# Altium PCB PCB1.PcbDoc (part 1 of 3)
Units mm, origin at the board's own origin, x right, y up, seen from the top; angles counter-clockwise.
Board outline 76.07 x 51.31 mm, 2 copper layers (Top Layer, Bottom Layer), stack 0.771 mm thick; 93 components, 68 nets, 330 pads, 277 vias.
Unrouted connection lines stored in the file: 4.
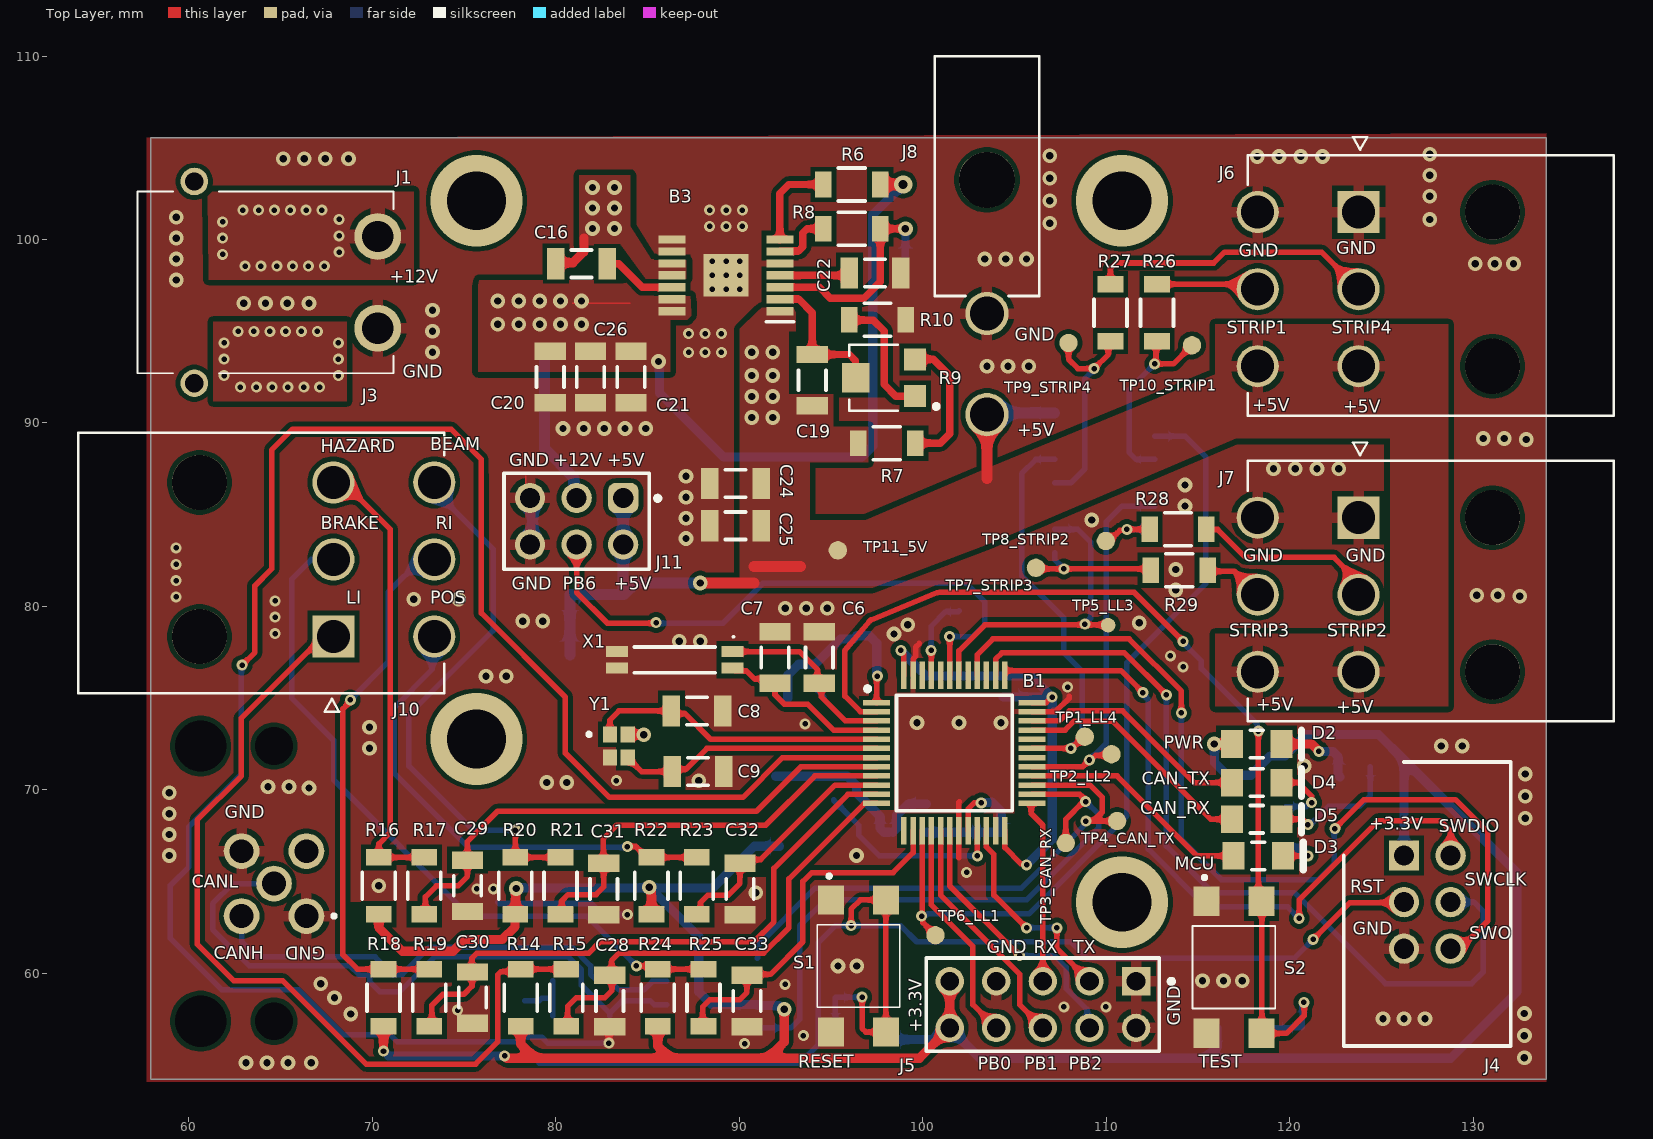
[diagram p0: Top Layer view]
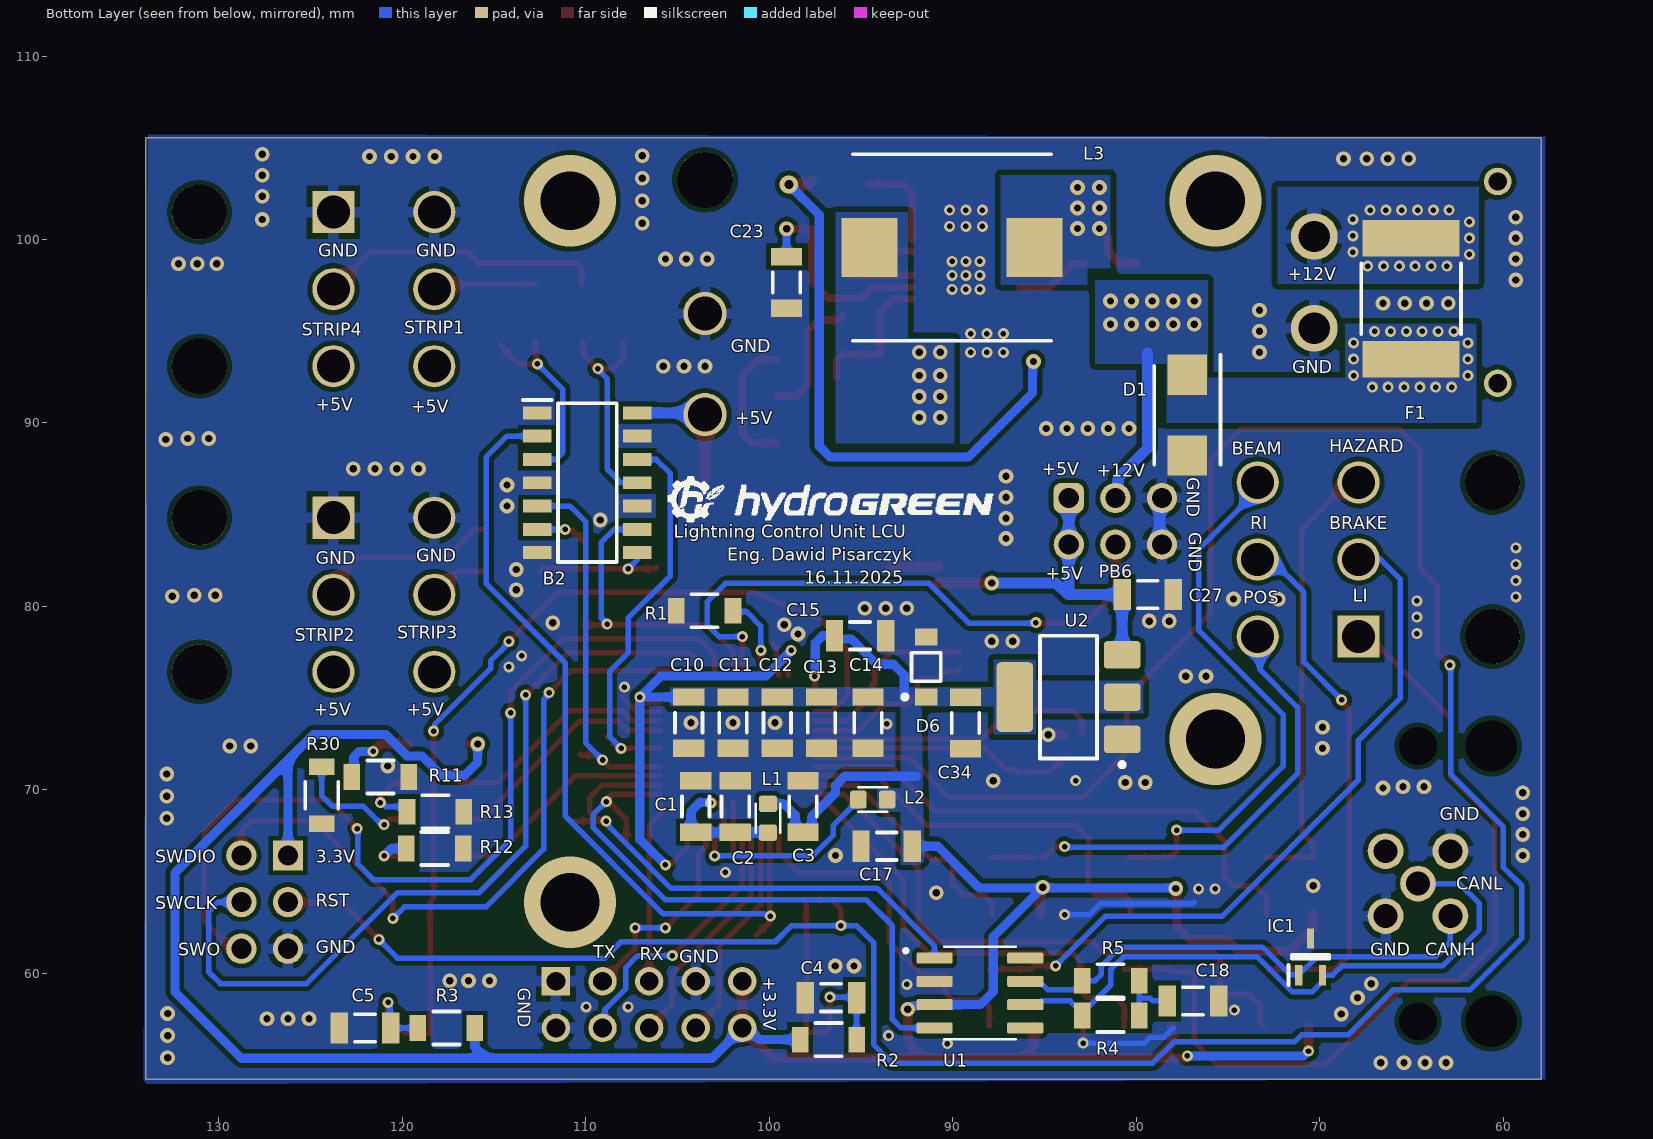
[diagram p1: Bottom Layer view, seen from below]
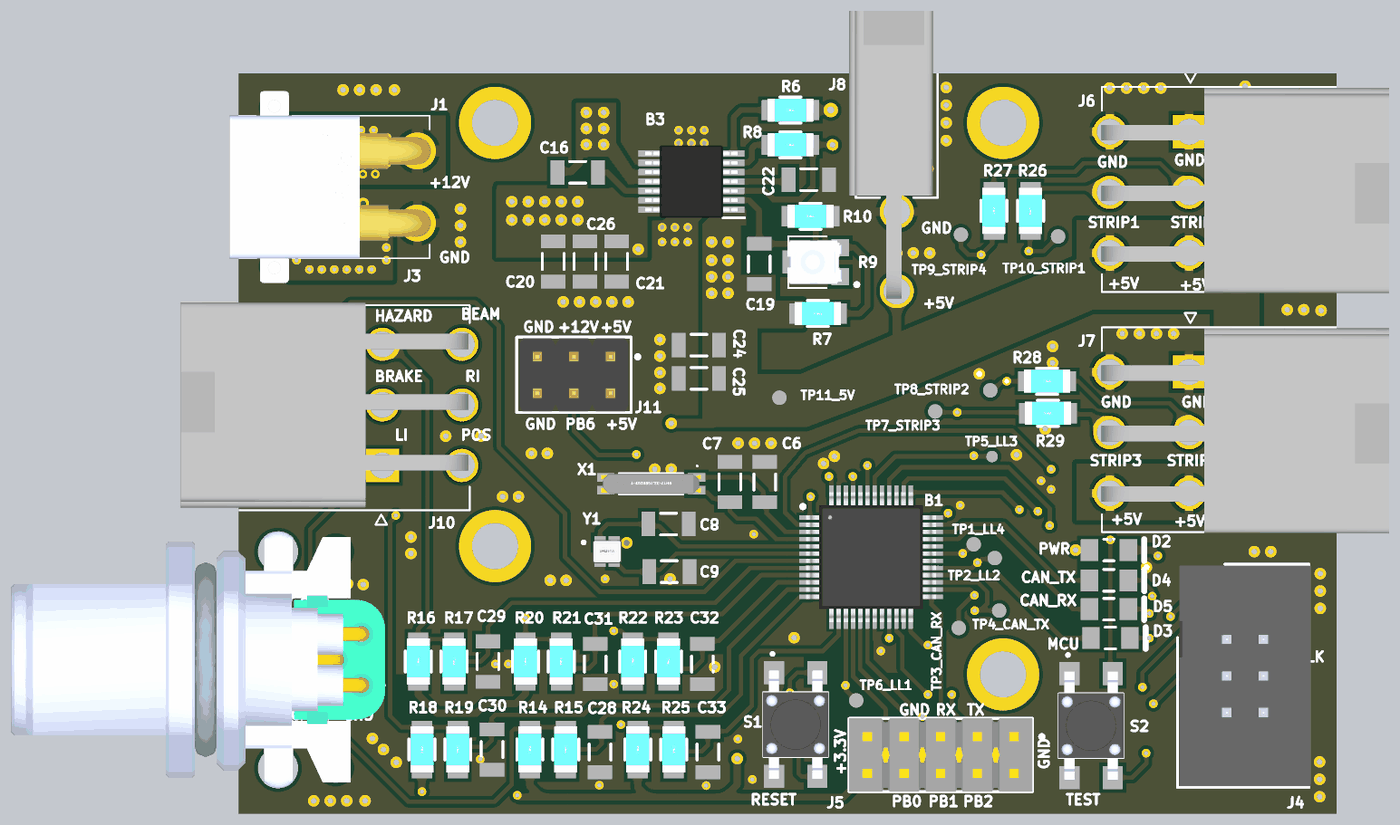
[diagram p3: 3D render of the assembled board from above, using the file's embedded part models]
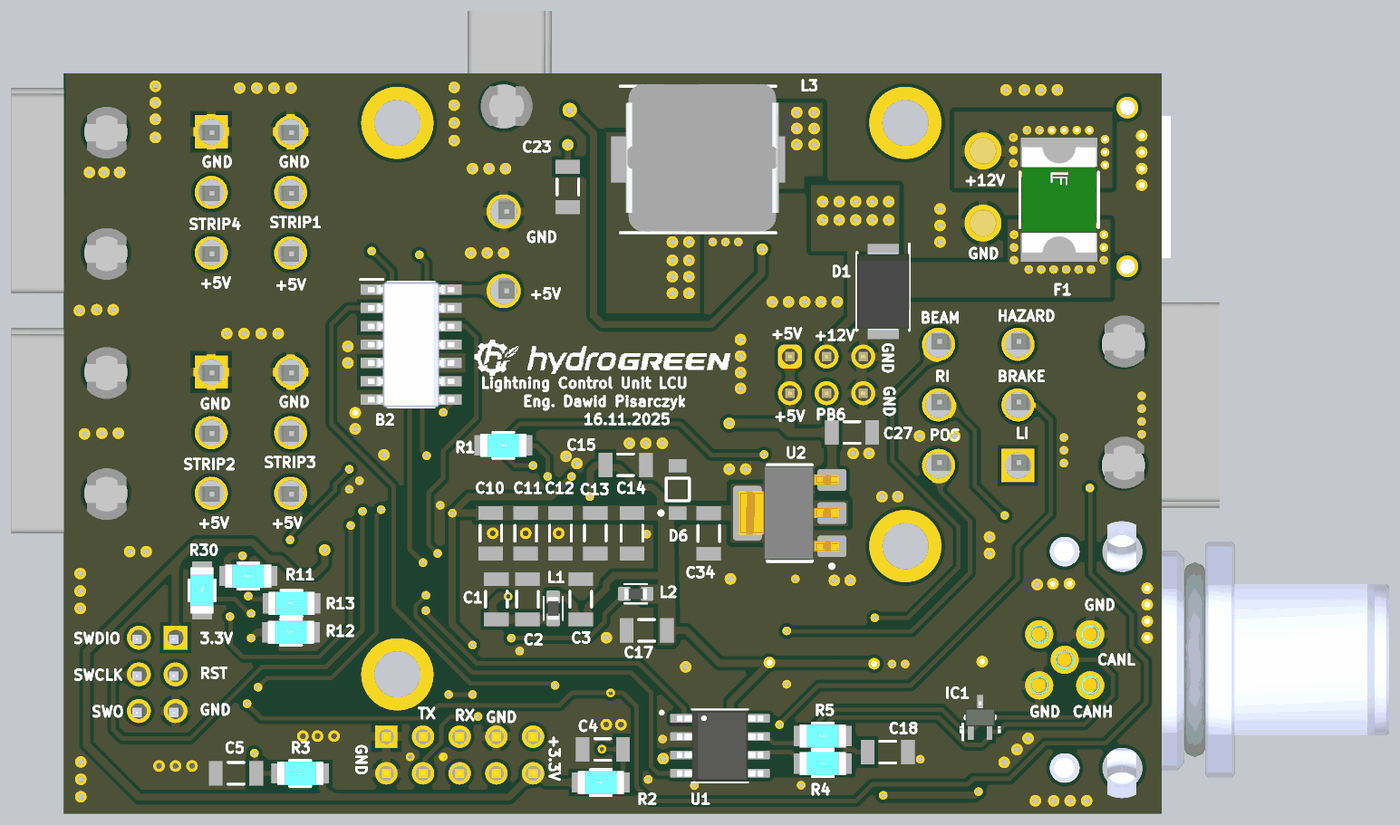
[diagram p4: 3D render of the assembled board from below, using the file's embedded part models]

## Layer stack, top to bottom
Top Solder: solder mask 0.0102, Solder Resist, Dk 3.5
Top Layer: signal copper 0.0356
Dielectric 1: dielectric 0.7, FR-4, Dk 4.8
Bottom Layer: signal copper 0.0356
Bottom Solder: solder mask 0.0102, Solder Resist, Dk 3.5

## Board outline
57.912,54.229 133.985,54.229 133.985,54.237 133.985,105.537 57.912,105.537

## Design rules (kind name [scope] priority, off if disabled: settings)
Clearance stm32g4 [HasFootprint('STM32G491CET6')] p1: gap=0.2 ignorepadtopadclearanceinfootprint=TRUE
Clearance [All] p2: gap=0.25 ignorepadtopadclearanceinfootprint=TRUE except(0.2: Arc-Arc Arc-Track Arc-SMDPad Track-Track Track-SMDPad SMDPad-SMDPad; 0.3: Poly-Poly)
DiffPairsRouting [All] p1: maxlimit=0.25 minlimit=0.2 mostfreqgap=0.2 toplayer_minwidth=0.3 toplayer_maxwidth=0.3 toplayer_prefwidth=0.3 bottomlayer_minwidth=0.3 bottomlayer_maxwidth=0.3 bottomlayer_prefwidth=0.3 maxuncoupledlength=12.7
HoleSize [All] p1: absolutevalues=TRUE maxlimit=5 minlimit=0.025 maxpercent=80.000 minpercent=20.000
PolygonConnect VIN [InNet('VIN')] p1: thpad.connectstyle=Relief thpad.reliefconductorwidth=0.3 thpad.reliefentries=4 thpad.polygonreliefangle="90 Angle" thpad.airgapwidth=0.3 smdpad.connectstyle=Direct smdpad.reliefconductorwidth=0.254 smdpad.reliefentries=4 smdpad.polygonreliefangle="90 Angle" smdpad.airgapwidth=0.254 via.connectstyle=Direct via.reliefconductorwidth=0.254 via.reliefentries=4 via.polygonreliefangle="90 Angle" via.airgapwidth=0.254
PolygonConnect +5V_OUT [InNet('+5V_OUT') vs InNet('+5V_OUT')] p2: thpad.connectstyle=Relief thpad.reliefconductorwidth=0.6 thpad.reliefentries=4 thpad.polygonreliefangle="90 Angle" thpad.airgapwidth=0.3 smdpad.connectstyle=Direct smdpad.reliefconductorwidth=0.254 smdpad.reliefentries=4 smdpad.polygonreliefangle="90 Angle" smdpad.airgapwidth=0.254 via.connectstyle=Direct via.reliefconductorwidth=0.254 via.reliefentries=4 via.polygonreliefangle="90 Angle" via.airgapwidth=0.254
PolygonConnect PolygonConnect_1 [InNet('NetD1_3') vs InNet('NetD1_3')] p3: thpad.connectstyle=Relief thpad.reliefconductorwidth=0.6 thpad.reliefentries=4 thpad.polygonreliefangle="90 Angle" thpad.airgapwidth=0.3 smdpad.connectstyle=Direct smdpad.reliefconductorwidth=0.254 smdpad.reliefentries=4 smdpad.polygonreliefangle="90 Angle" smdpad.airgapwidth=0.254 via.connectstyle=Direct via.reliefconductorwidth=0.254 via.reliefentries=4 via.polygonreliefangle="90 Angle" via.airgapwidth=0.254
PolygonConnect [InNet('NetB3_13') vs InNet('NetB3_13')] p4: thpad.connectstyle=Relief thpad.reliefconductorwidth=0.6 thpad.reliefentries=4 thpad.polygonreliefangle="90 Angle" thpad.airgapwidth=0.3 smdpad.connectstyle=Direct smdpad.reliefconductorwidth=0.254 smdpad.reliefentries=4 smdpad.polygonreliefangle="90 Angle" smdpad.airgapwidth=0.254 via.connectstyle=Direct via.reliefconductorwidth=0.254 via.reliefentries=4 via.polygonreliefangle="90 Angle" via.airgapwidth=0.254
PolygonConnect +3V3 [InNet('+3V3') vs InNet('+3V3')] p5: thpad.connectstyle=Relief thpad.reliefconductorwidth=0.6 thpad.reliefentries=4 thpad.polygonreliefangle="90 Angle" thpad.airgapwidth=0.3 smdpad.connectstyle=Direct smdpad.reliefconductorwidth=0.254 smdpad.reliefentries=4 smdpad.polygonreliefangle="90 Angle" smdpad.airgapwidth=0.254 via.connectstyle=Direct via.reliefconductorwidth=0.254 via.reliefentries=4 via.polygonreliefangle="90 Angle" via.airgapwidth=0.254
PolygonConnect +5V_EXT [InNet('+5V_EXT') vs InNet('+5V_EXT')] p6: thpad.connectstyle=Relief thpad.reliefconductorwidth=0.6 thpad.reliefentries=4 thpad.polygonreliefangle="90 Angle" thpad.airgapwidth=0.4 smdpad.connectstyle=Direct smdpad.reliefconductorwidth=0.254 smdpad.reliefentries=4 smdpad.polygonreliefangle="90 Angle" smdpad.airgapwidth=0.254 via.connectstyle=Direct via.reliefconductorwidth=0.254 via.reliefentries=4 via.polygonreliefangle="90 Angle" via.airgapwidth=0.254
PolygonConnect GND_1 [InNet('GND')] p7: thpad.connectstyle=Relief thpad.reliefconductorwidth=0.6 thpad.reliefentries=4 thpad.polygonreliefangle="90 Angle" thpad.airgapwidth=0.3 smdpad.connectstyle=Direct smdpad.reliefconductorwidth=0.254 smdpad.reliefentries=4 smdpad.polygonreliefangle="90 Angle" smdpad.airgapwidth=0.254 via.connectstyle=Direct via.reliefconductorwidth=0.254 via.reliefentries=4 via.polygonreliefangle="90 Angle" via.airgapwidth=0.254
PolygonConnect SW [InNet('SW') vs InNet('SW')] p8: thpad.connectstyle=Relief thpad.reliefconductorwidth=0.6 thpad.reliefentries=4 thpad.polygonreliefangle="90 Angle" thpad.airgapwidth=0.3 smdpad.connectstyle=Direct smdpad.reliefconductorwidth=0.254 smdpad.reliefentries=4 smdpad.polygonreliefangle="90 Angle" smdpad.airgapwidth=0.254 via.connectstyle=Direct via.reliefconductorwidth=0.254 via.reliefentries=4 via.polygonreliefangle="90 Angle" via.airgapwidth=0.254
PolygonConnect +5V [InNet('+5V') vs InNet('+5V')] p9: thpad.connectstyle=Relief thpad.reliefconductorwidth=0.6 thpad.reliefentries=4 thpad.polygonreliefangle="90 Angle" thpad.airgapwidth=0.3 smdpad.connectstyle=Direct smdpad.reliefconductorwidth=0.254 smdpad.reliefentries=4 smdpad.polygonreliefangle="90 Angle" smdpad.airgapwidth=0.254 via.connectstyle=Direct via.reliefconductorwidth=0.254 via.reliefentries=4 via.polygonreliefangle="90 Angle" via.airgapwidth=0.254
PolygonConnect +12 [InNet('+12V') vs InNet('+12V')] p10: thpad.connectstyle=Relief thpad.reliefconductorwidth=0.8 thpad.reliefentries=4 thpad.polygonreliefangle="90 Angle" thpad.airgapwidth=0.3 smdpad.connectstyle=Direct smdpad.reliefconductorwidth=0.254 smdpad.reliefentries=4 smdpad.polygonreliefangle="90 Angle" smdpad.airgapwidth=0.254 via.connectstyle=Direct via.reliefconductorwidth=0.254 via.reliefentries=4 via.polygonreliefangle="90 Angle" via.airgapwidth=0.254
RoutingVias 3V_3 [InNet('+3V3')] p1: holewidth=0.4 width=0.8 viastyle="Through Hole" minholewidth=0.3 minwidth=0.6 maxholewidth=0.5 maxwidth=1
RoutingVias GND [InNet('GND')] p2: holewidth=0.3 width=0.6 viastyle="Through Hole" minholewidth=0.3 minwidth=0.6 maxholewidth=0.3 maxwidth=0.6
RoutingVias [All] p3: holewidth=0.3 width=0.6 viastyle="Through Hole" minholewidth=0.2 minwidth=0.4 maxholewidth=0.5 maxwidth=1
SolderMaskExpansion [All] p1: expansion=0 istentingtop=FALSE
SupplyNets "Schematic Supply Nets_1" [InNet('VIN')] p1: voltage=0.000
SupplyNets "Schematic Supply Nets_6" [InNet('GND')] p2: voltage=0.000
SupplyNets "Schematic Supply Nets_3" [InNet('+3V3')] p3: voltage=0.000
SupplyNets "Schematic Supply Nets_2" [InNet('+5V')] p4: voltage=0.000
SupplyNets "Schematic Supply Nets" [InNet('+12V')] p5: voltage=0.000
Width 3V3 [InNet('+3V3')] p1: maxlimit=1 minlimit=0.3 preferedwidth=0.5
Width [All] p2: maxlimit=1 minlimit=0.3 preferedwidth=0.3 minimp=50.000000 maximp=50.000000 favimp=50.000000
28 further rules are at their usual default settings.

## Classes and differential pairs
component class POWER: 0.7 B3 C16 C19 C20 C21 C22 C23 C24 C25 C26 C27 C34 D1 D6 F1 L3 R6 R7 R8 R9 R10 U2
component class MCU: B1 C1 C2 C3 C4 C5 C6 C7 C8 C9 C10 C11 C12 C13 C14 C15 D2 D3 D4 D5 L1 L2 R1 R2 R3 R11 R12 R13 R30 S1 S2 X1 Y1
component class main: J1 J3 J4 J5 J6 J7 J8 J10 J11
component class IO: B2 C17 C18 C28 C29 C30 C31 C32 C33 IC1 R4 R5 R14 R15 R16 R17 R18 R19 R20 R21 R22 R23 R24 R25 R26 R27 R28 R29 U1

## Components (designator, comment, footprint, x,y, rotation, side; value= is the part's Value field where it differs from the comment)
B1 "STM32G491CET6" STM32G491CET6 101.727,72.009 r0 top
B2 "74AHCT125D_112" 74AHCT125D_112 109.924,86.741 r180 bottom
B3 "TPS54626PWPR" TPS54626PWPR 89.281,98.044 r180 top
C1 "1u" CAPC1206(3216)150_L 104.013,69.088 r90 bottom value=1.8uF
C2 "100n" CAPC1206(3216)150_L 101.854,69.088 r90 bottom value=1.8uF
C3 "100n" CAPC1206(3216)150_L 98.171,69.088 r90 bottom value=1.8uF
C4 "100n" CAPC1206(3216)150_L 96.647,58.674 r0 bottom value=1.8uF
C5 "100n" CAPC1206(3216)150_L 122.047,57.023 r0 bottom value=1.8uF
C6 "20p" CAPC1206(3216)150_L 94.361,77.216 r90 top value=1.8uF
C7 "20p" CAPC1206(3216)150_L 91.948,77.216 r90 top value=1.8uF
C8 "12p" CAPC1206(3216)150_L 87.7,74.3 r0 top value=1.8uF
C9 "12p" CAPC1206(3216)150_L 87.75,71.001 r0 top value=1.8uF
C10 "100n" CAPC1206(3216)150_L 104.394,73.66 r270 bottom value=1.8uF
C11 "100n" CAPC1206(3216)150_L 101.981,73.66 r270 bottom value=1.8uF
C12 "100n" CAPC1206(3216)150_L 99.568,73.66 r270 bottom value=1.8uF
C13 "100n" CAPC1206(3216)150_L 97.155,73.66 r270 bottom value=1.8uF
C14 "4u7" CAPC1206(3216)150_L 94.615,73.66 r270 bottom value=1.8uF
C15 "100n" CAPC1206(3216)150_L 95.05,78.4 r180 bottom value=1.8uF
C16 "100n" CAPC1206(3216)150_L 81.407,98.679 r180 top value=1.8uF
C17 "100n" CAPC1206(3216)150_L 93.602,66.929 r0 bottom value=1.8uF
C18 "4n7" CAPC1206(3216)150_L 76.9,58.5 r180 bottom value=1.8uF
C19 "5p1" CAPC1206(3216)150_L 93.98,92.329 r90 top value=1.8uF
C20 "10u" CAPC1206(3216)150_L 81.9,92.5 r270 top value=1.8uF
C21 "0.1u" CAPC1206(3216)150_L 84.1,92.5 r270 top value=1.8uF
C22 "8n2" CAPC1206(3216)150_L 97.409,98.171 r0 top value=1.8uF
C23 "1u" CAPC1206(3216)150_L 99.06,97.663 r270 bottom value=1.8uF
C24 "22u" CAPC1206(3216)150_L 89.8,86.7 r180 top value=1.8uF
C25 "22u" CAPC1206(3216)150_L 89.8,84.4 r180 top value=1.8uF
C26 "10u" CAPC1206(3216)150_L 79.7,92.5 r270 top value=1.8uF
C27 "10u" CAPC1206(3216)150_L 79.375,80.645 r180 bottom value=1.8uF
C28 "100n" CAPC1206(3216)150_L 82.948,58.499 r270 top value=1.8uF
C29 "100n" CAPC1206(3216)150_L 75.185,64.77 r270 top value=1.8uF
C30 "100n" CAPC1206(3216)150_L 75.471,58.674 r270 top value=1.8uF
C31 "100n" CAPC1206(3216)150_L 82.614,64.595 r270 top value=1.8uF
C32 "100n" CAPC1206(3216)150_L 90.043,64.595 r270 top value=1.8uF
C33 "100n" CAPC1206(3216)150_L 90.424,58.499 r270 top value=1.8uF
C34 "22u" CAPC1206(3216)150_L 89.3,73.65 r270 bottom value=1.8uF
D1 "SMBJ13A-E3_5B" DIOM5436X244N 77.216,90.424 r270 bottom
D2 "" LUMX-SML-LX1206YC-TR_V 118.2,72.5 r0 top
D3 "" LUMX-SML-LX1206YC-TR_V 118.3,66.4 r0 top
D4 "" LUMX-SML-LX1206YC-TR_V 118.2,70.4 r0 top
D5 "" LUMX-SML-LX1206YC-TR_V 118.2,68.4 r0 top
D6 "MMSZ3V3T1G" ONSC-SOD-123-2-425-04_V 91.45,76.7 r90 bottom
F1 "2920L400/15MR" FP-2920L400-15MR-MFG 65.024,96.774 r270 bottom
IC1 "SP0502BAJTG" SOT132P220X110-3N 70.5,60.9 r90 bottom
J1 "XT30PW-M" XT30PWM 64.389,97.663 r90 top
J3 "39301060" 39301060 67.879,78.359 r270 top
J4 "61200621621" 61200621621 126.238,66.421 r270 top
J5 "TSW-105-07-G-D" SMTC-TSW-105-07-G-D_V 106.553,58.293 r180 top
J6 "39301060" 39301060 123.764,101.491 r90 top
J7 "39301060" 39301060 123.764,84.836 r90 top
J8 "39301020" 39301020 103.505,95.961 r180 top
J10 "M12A-05PMMR-SF7003" M12A05PMMRSF7003 66.411,63.122 r270 top
J11 "61300621121" 61300621121 81.138,84.641 r180 top
L1 "MPZ1608S601ATA00" INDC1608X95N 100.076,68.453 r90 bottom
L2 "MPZ1608S601ATA00" INDC1608X95N 94.361,69.469 r180 bottom
L3 "IHLP4040DZER3R3M01" IHLP4040DZER3R3M01 90.043,99.568 r0 bottom value=3.3µH
R1 "10k" FP-RK73H2B-MFG 103.531,79.756 r180 bottom
R2 "10k" FP-RK73H2B-MFG 96.774,56.388 r0 bottom
R3 "10k" FP-RK73H2B-MFG 117.602,57.023 r180 bottom
R4 "60" FP-RK73H2B-MFG 81.4,59.6 r0 bottom
R5 "60" FP-RK73H2B-MFG 81.4,57.7 r0 bottom
R6 "10k" FP-RK73H2B-MFG 96.139,102.997 r0 top
R7 "120k" FP-RK73H2B-MFG 98.044,88.9 r0 top
R8 "100k" FP-RK73H2B-MFG 96.139,100.584 r0 top
R9 "2k" TRIM_TC33X-2-503E 97.79,92.456 r180 top
R10 "20k" FP-RK73H2B-MFG 97.536,95.631 r0 top
R11 "1k" FP-RK73H2B-MFG 121.2,70.7 r0 bottom
R12 "1k" FP-RK73H2B-MFG 118.237,66.802 r0 bottom
R13 "1k" FP-RK73H2B-MFG 118.2,68.8 r0 bottom
R14 "10k" FP-RK73H2B-MFG 78.088,58.674 r90 top
R15 "1k" FP-RK73H2B-MFG 80.58,58.674 r270 top
R16 "10k" FP-RK73H2B-MFG 70.358,64.77 r90 top
R17 "1k" FP-RK73H2B-MFG 72.834,64.77 r270 top
R18 "10k" FP-RK73H2B-MFG 70.612,58.674 r90 top
R19 "1k" FP-RK73H2B-MFG 73.104,58.674 r270 top
R20 "10k" FP-RK73H2B-MFG 77.787,64.77 r90 top
R21 "1k" FP-RK73H2B-MFG 80.263,64.77 r270 top
R22 "10k" FP-RK73H2B-MFG 85.215,64.77 r90 top
R23 "1k" FP-RK73H2B-MFG 87.692,64.77 r270 top
R24 "10k" FP-RK73H2B-MFG 85.565,58.674 r90 top
R25 "1k" FP-RK73H2B-MFG 88.057,58.674 r270 top
R26 "330R" FP-RK73H2B-MFG 112.776,96.012 r270 top
R27 "330R" FP-RK73H2B-MFG 110.236,96.012 r90 top
R28 "330R" FP-RK73H2B-MFG 113.919,84.201 r0 top
R29 "330R" FP-RK73H2B-MFG 113.983,81.978 r0 top
R30 "1k" FP-RK73H2B-MFG 124.4,69.7 r90 bottom
S1 "TL3305BF100QG" TL3305BF160QG 96.5,60.4 r270 top
S2 "TL3305BF100QG" TL3305BF160QG 116.967,60.325 r270 top
U1 "SN65HVD232D" SN65HVD232D 88.519,58.928 r180 bottom
U2 "LDI1117-3.3H" LDI1117-3.3H 83.693,75.057 r0 bottom
X1 "9HT7-32.768KDZF-T" 9HT732768KDZFT 86.487,77.089 r180 top
Y1 "ABM11W-24.0000MHZ-8-D1X-T3" XTAL_ABM11W-24.0000MHZ-8-D1X-T3 83.439,72.39 r0 top

## Footprints (in the part's own frame and the unit in brackets; to place one, negate y for a bottom-side part, rotate by r counter-clockwise, add the part's x,y. Pads: shape width x height; smd on the part's side, far side on the other; paste and mask are expansions set on the pad)
9HT732768KDZFT [mm]
  rect 1.2x0.6 smd: 1(-3.15,-0.45) 2(3.15,-0.45) 3(3.15,0.45) 4(-3.15,0.45)
  silkscreen extent -3.25,-1.3 2.2,0.7, body extent -3.45,-0.71 3.45,0.69, height 1.25
74AHCT125D_112 [mm]
  rect 1.55x0.7 smd: 1(-2.725,3.81) 2(-2.725,2.54) 3(-2.725,1.27) 4(-2.725,0) 5(-2.725,-1.27) 6(-2.725,-2.54) 7(-2.725,-3.81) 8(2.725,-3.81) 9(2.725,-2.54) 10(2.725,-1.27) 11(2.725,0) 12(2.725,1.27) 13(2.725,2.54) 14(2.725,3.81)
  silkscreen extent -3.5,-4.33 1.6,4.51, body extent -3,-4.33 3,4.32, height 1.48
39301020 [mil]
  round 93 hole 73: 1(0,0) 2(0,217)
  round 120 hole 120 unplated: ""(0,-287)
  silkscreen extent -112,-552 112,-38, body extent -98,-547 130,237, height 449
39301060 [mm]
  rect 2.3x2.3 / inner round 2.3 / far side rect 2.3x2.3 hole 1.8 mask+0.076: 1(0,0)
  round 2.3 hole 1.8 mask+0.076: 2(-4.2,0) 3(-8.4,0) 4(0,5.5) 5(-4.2,5.5) 6(-8.4,5.5)
  round 3 hole 3 unplated mask+0.076: ""(-8.4,-7.3) ""(0,-7.3)
  silkscreen extent -11.1,-13.9 4.1,6.04, body extent -11.3,-13.97 2.9,5.96, height 11.4
61200621621 [mm]
  rect 1.65x1.65 / inner round 1.65 / far side rect 1.65x1.65 hole 1.1: 1(0,0)
  round 1.65 hole 1.1: 2(0,2.54) 3(2.54,0) 4(2.54,2.54) 5(5.08,0) 6(5.08,2.54)
  silkscreen extent -5.1,-3.28 10.38,5.82, body extent -4.99,-3.15 10.29,5.95, height 9.1
61300621121 [mm] "Pin Header, pitch 2.54 mm, THT, Vertical, dual row, 6p"
  rrect50% 1.65x1.65 hole 1.1: 1(-2.54,-1.27)
  round 1.65 hole 1.1: 2(-2.54,1.27) 3(0,-1.27) 4(0,1.27) 5(2.54,-1.27) 6(2.54,1.27)
  silkscreen extent -4.54,-2.62 3.96,2.62, body extent -3.81,-2.54 3.81,2.54, height 8.59
CAPC1206(3216)150_L [mm] "Chip Capacitor, Body 3.2x1.6mm, Height 1.5mm, IPC High Density"
  rect 0.95x1.7 smd: 1(-1.4,0) 2(1.4,0)
  silkscreen extent -0.55,-0.75 0.55,0.75, body extent -1.7,-0.9 1.7,0.9, height 1.5
DIOM5436X244N [mm]
  rect 2.2x2.15 smd: 1(-2.2,0) 2(2.2,0)
  silkscreen extent -3.27,-1.81 2.7,1.81, body extent -2.7,-1.81 2.7,1.81, height 2.44
FP-2920L400-15MR-MFG [mm]
  rect 2x5.3 smd paste+0 mask+0: 1(-3.3,0) 2(3.3,0)
  silkscreen extent -1.92,-2.72 1.92,2.72, body extent -3.68,-2.56 3.68,2.56, height 1.6
FP-RK73H2B-MFG [mm]
  rect 0.9x1.4 smd paste+0 mask+0: 1(-1.55,0) 2(1.55,0)
  silkscreen extent -0.72,-0.9 0.72,0.9, body extent -1.6,-0.8 1.6,0.8, height 0.7
IHLP4040DZER3R3M01 [mm]
  rect 3.05x3.2 smd: 1(-4.5,0) 2(4.5,0)
  silkscreen extent -5.4,-5.08 5.4,5.08, body extent -5.61,-5.23 5.01,4.98, height 3.78
INDC1608X95N [mm]
  rrect30% 0.9x0.97 smd: 1(-0.785,0) 2(0.785,0)
  silkscreen extent -0.8,-0.66 0.8,0.66, body extent -0.8,-0.4 0.8,0.4, height 0.95
LDI1117-3.3H [mm] "LDI1117-3.3H, 4-Leads"
  rrect25% 2x1.5 smd: 1(-2.925,2.3) 2(-2.925,0) 3(-2.925,-2.3)
  rrect25% 2x3.8 smd: 4(2.925,0)
  silkscreen extent -3.05,-3.35 1.55,3.81, body extent -3.44,-3.26 3.56,3.24, height 1.64
LUMX-SML-LX1206YC-TR_V [mm] "SMD, 2-Leads, Body 3.2x1.5mm"
  rect 1.2x1.5 smd: 1(-1.35,0) 2(1.35,0)
  silkscreen extent -0.35,-0.75 2.45,0.75, body extent -1.6,-0.75 1.6,0.75, height 1.25
M12A05PMMRSF7003 [mm]
  round 1.95 hole 1.3: 1(0,0) 2(-3.536,0) 3(-3.536,-3.536) 4(0,-3.536) 5(-1.768,-1.768)
  round 1.025 hole 2.05 unplated: 6(5.732,-1.768) 7(-9.268,-1.768)
  round 1.4 hole 2.8 unplated: 8(-9.268,-5.768) 9(5.732,-5.768)
  silkscreen extent -0.1,1.4 0.1,1.6, body extent -11.38,-24.23 7.82,1.65, height 16.39
ONSC-SOD-123-2-425-04_V [mm] "SOD, 2-Leads, Body 2.69x1.6mm"
  rect 0.91x1.22 smd: 1(-1.635,0) 2(1.635,0)
  silkscreen extent -1.76,-0.8 0.78,1.29, body extent -1.35,-0.8 1.35,0.8, height 1.35
SMTC-TSW-105-07-G-D_V [mm] "THD, 10-Leads, Body 12.7x5.08mm, Pitch 2.54mm"
  rect 1.55x1.55 hole 1.02: 1(-5.08,-1.27)
  round 1.55 hole 1.02: 2(-5.08,1.27) 3(-2.54,-1.27) 4(-2.54,1.27) 5(0,-1.27) 6(0,1.27) 7(2.54,-1.27) 8(2.54,1.27) 9(5.08,-1.27) 10(5.08,1.27)
  silkscreen extent -7.13,-2.54 6.35,2.54, body extent -6.35,-2.54 6.35,2.54, height 8.38
SN65HVD232D [mm]
  rrect25% 1.97x0.6 smd: 1(-2.47,1.905) 2(-2.47,0.635) 3(-2.47,-0.635) 4(-2.47,-1.905) 5(2.47,-1.905) 6(2.47,-0.635) 7(2.47,0.635) 8(2.47,1.905)
  silkscreen extent -4.14,-2.52 1.95,2.52, body extent -3,-2.45 3,2.45, height 1.75
SOT132P220X110-3N [mm]
  rect 1.1x0.4 smd: 1(-1,0.65) 2(-1,-0.65) 3(1,0)
  silkscreen extent -1.55,-1.02 0.1,1.2, body extent -1.1,-1.43 1.1,1.43, height 1.1
STM32G491CET6 [mm]
  rect 1.475x0.3 smd: 1(-4.238,2.75) 2(-4.238,2.25) 3(-4.238,1.75) 4(-4.238,1.25) 5(-4.238,0.75) 6(-4.238,0.25) 7(-4.238,-0.25) 8(-4.238,-0.75) 9(-4.238,-1.25) 10(-4.238,-1.75) 11(-4.238,-2.25) 12(-4.238,-2.75) 25(4.238,-2.75) 26(4.238,-2.25) 27(4.238,-1.75) 28(4.238,-1.25) 29(4.238,-0.75) 30(4.238,-0.25) 31(4.238,0.25) 32(4.238,0.75) 33(4.238,1.25) 34(4.238,1.75) 35(4.238,2.25) 36(4.238,2.75)
  rect 0.3x1.475 smd: 13(-2.75,-4.238) 14(-2.25,-4.238) 15(-1.75,-4.238) 16(-1.25,-4.238) 17(-0.75,-4.238) 18(-0.25,-4.238) 19(0.25,-4.238) 20(0.75,-4.238) 21(1.25,-4.238) 22(1.75,-4.238) 23(2.25,-4.238) 24(2.75,-4.238) 37(2.75,4.238) 38(2.25,4.238) 39(1.75,4.238) 40(1.25,4.238) 41(0.75,4.238) 42(0.25,4.238) 43(-0.25,4.238) 44(-0.75,4.238) 45(-1.25,4.238) 46(-1.75,4.238) 47(-2.25,4.238) 48(-2.75,4.238)
  silkscreen extent -4.85,-3.15 3.15,3.62, body extent -4.5,-4.5 4.5,4.5, height 1.6
TL3305BF160QG [mm]
  rect 1.6x1.4 smd: 1(-3.6,-1.5) 2(3.6,-1.5) 3(-3.6,1.5) 4(3.6,1.5)
  silkscreen extent -5,-2.25 2.25,2.25, body extent -3.75,-2.25 3.75,2.25, height 4.9
TPS54626PWPR [mm]
  rect 1.475x0.45 smd: 1(-2.938,1.95) 2(-2.938,1.3) 3(-2.938,0.65) 4(-2.938,0) 5(-2.938,-0.65) 6(-2.938,-1.3) 7(-2.938,-1.95) 8(2.938,-1.95) 9(2.938,-1.3) 10(2.938,-0.65) 11(2.938,0) 12(2.938,0.65) 13(2.938,1.3) 14(2.938,1.95)
  rect 2.46x2.31 smd: 15(0,0)
  silkscreen extent -3.67,2.52 -2.2,2.52, body extent -3.2,-2.5 3.2,2.5, height 1.13
TRIM_TC33X-2-503E [mm]
  rect 1.2x1.2 smd: 1(-1.8,1) 3(-1.8,-1)
  rect 1.5x1.6 smd: 2(1.45,0)
  silkscreen extent -3.07,-1.8 1.8,1.8, body extent -1.9,-1.5 1.9,1.5, height 1.1
XT30PWM [mm]
  round 2.55 hole 1.7: 1(-2.5,-5.912) 2(2.5,-5.912)
  round 1.5 hole 1: 3(5.5,4.088) 4(-5.5,4.088)
  silkscreen extent -4.95,-6.76 4.95,7.19, body extent -6.65,-6.86 6.65,7.09, height 5.1
XTAL_ABM11W-24.0000MHZ-8-D1X-T3 [mm]
  rect 0.775x0.875 smd: 1(-0.487,0.637) 2(-0.487,-0.637) 3(0.487,-0.637) 4(0.487,0.637)
  silkscreen extent -1.72,0.54 -1.53,0.74, body extent -1,-0.8 1,0.8, height 0.5

## Part data
B1: "ARM Microcontrollers - MCU Mainstream Arm Cortex-M4+ MCU 170MHz with 512Kbytes of Flash memory", Manufacturer_Name=STMicroelectronics, Mouser Part Number=511-STM32G491CET6, Arrow Part Number=STM32G491CET6, Arrow Price/Stock=https://www.arrow.com/en/products/stm32g491cet6/stmicroelectronics?region=nac, ComponentLink1Description=Datasheet, ComponentLink1URL=https://datasheet.octopart.com/STM32G491CET6-STMicroelectronics-datasheet-151949616.pdf?src-supplier=Future+Electronics, Datasheet Link=https://cz.mouser.com/datasheet/2/389/dm00654712-2042072.pdf, Geometry.Height=1.6mm, Manufacturer_Part_Number=STM32G491CET6, Mouser Price/Stock=https://www.mouser.co.uk/ProductDetail/STMicroelectronics/STM32G491CET6?qs=eP2BKZSCXI5LxAF%2FNuF5Tg%3D%3D, Supplier=Mouser, Supplier 1=Mouser, Supplier Part Number=511-STM32G491CET6, Supplier Part Number 1=511-STM32G491CET6
B2: "74AHC(T)125 - Quad buffer/line driver; 3-state@en-us", Arrow Part Number=74AHCT125D,112, Manufacturer_Name=Nexperia, Mouser Part Number=771-AHCT125D112, Arrow Price/Stock=https://www.arrow.com/en/products/74ahct125d112/nexperia?region=europe, Datasheet Link=https://assets.nexperia.com/documents/data-sheet/74AHC_AHCT125.pdf, Geometry.Height=1.75mm, Manufacturer_Part_Number=74AHCT125D,112, Mouser Price/Stock=https://www.mouser.com/Search/Refine.aspx?Keyword=771-AHCT125D112
B3: "4.5-V to 18-V, 6.5-A synchronous buck converter with eco-mode in HTSSOP package 14-HTSSOP -40 to 85", Case/Package=SOP, Manufacturer="Texas Instruments", Manufacturer Lifecycle Status=ACTIVE, Max Junction Temperature (Tj)=150°C, Max Operating Temperature=85°C, Max Output current=6.5A, Max Output Voltage=5.5V, Max Supply Voltage=18V, Min Input Voltage=4.5V, Min Operating Temperature=-40°C, Min Output Voltage=765mV, Mouser Part Number=595-TPS54626PWPR, Quiescent Current=950µA, Supplier Part Number=296-40807-1-ND, Switching Frequency=650kHz, Arrow Part Number=TPS54626PWPR, Arrow Price/Stock=https://www.arrow.com/en/products/tps54626pwpr/texas-instruments, Category="Voltage Regulators - Switching", ComponentLink1Description=https://sigma.octopart.com:443/159569814/technical_drawing/Texas-Instruments-TPS54626PWPR.pdf?src-supplier=Texas+Instruments, ComponentLink1URL=https://sigma.octopart.com:443/159569814/technical_drawing/Texas-Instruments-TPS54626PWPR.pdf?src-supplier=Texas+Instruments, ComponentLink2Description=https://octopart.com:443/opatz8j6/c1?t=junKIVYlBbJDuToYkP2u6iV_naOc3Ho3DaOgm-CZ1UNwzrO6Mwyt4_bqvjuo9VmmQwBrWZSgc4LMoLaqIUkSz1Xp0i9S1rGYecaLkVbwuYCFoHmPHRnGPZOeqL-psw5WJA7ukYFP-z3UDe3vNSZVHaSS5TxmzYc38o1a76CPyg8DfEPdGkibNetDDoh0UPz4M4fSBrk37deijP5Y4U2a4nCx67PN7G5YxWzDYRetJGeVH0J_jhwrCM2X4qBFoA_wruu_NjKBHA4DIZrHf9JZLVDCNqpVByfdRJxT7EWUiLr8Dj5AnH3Xy44ZP455MYbgrmSiHAkyMUWlRSGl12e9NFk8w0cDAeKGDR43UxISDxcxxqmRqcKUGnIReVBdDrWwUstg4jH0&src-supplier=Texas+Instruments, ComponentLink2URL=https://octopart.com:443/opatz8j6/c1?t=junKIVYlBbJDuToYkP2u6iV_naOc3Ho3DaOgm-CZ1UNwzrO6Mwyt4_bqvjuo9VmmQwBrWZSgc4LMoLaqIUkSz1Xp0i9S1rGYecaLkVbwuYCFoHmPHRnGPZOeqL-psw5WJA7ukYFP-z3UDe3vNSZVHaSS5TxmzYc38o1a76CPyg8DfEPdGkibNetDDoh0UPz4M4fSBrk37deijP5Y4U2a4nCx67PN7G5YxWzDYRetJGeVH0J_jhwrCM2X4qBFoA_wruu_NjKBHA4DIZrHf9JZLVDCNqpVByfdRJxT7EWUiLr8Dj5AnH3Xy44ZP455MYbgrmSiHAkyMUWlRSGl12e9NFk8w0cDAeKGDR43UxISDxcxxqmRqcKUGnIReVBdDrWwUstg4jH0&src-supplier=Texas+Instruments, ComponentLink3Description=https://datasheet.octopart.com:443/TPS54626PWPR-Texas-Instruments-datasheet-20674354.pdf?src-supplier=Texas+Instruments, ComponentLink3URL=https://datasheet.octopart.com:443/TPS54626PWPR-Texas-Instruments-datasheet-20674354.pdf?src-supplier=Texas+Instruments, ComponentLink4Description=https://datasheet.octopart.com:443/TPS54626PWPR-Texas-Instruments-datasheet-17275025.pdf?src-supplier=Texas+Instruments, ComponentLink4URL=https://datasheet.octopart.com:443/TPS54626PWPR-Texas-Instruments-datasheet-17275025.pdf?src-supplier=Texas+Instruments, ComponentLink5Description=https://sigma.octopart.com:443/49250594/technical_drawing/Texas-Instruments-TPS54626PWPR.pdf?src-supplier=Texas+Instruments, ComponentLink5URL=https://sigma.octopart.com:443/49250594/technical_drawing/Texas-Instruments-TPS54626PWPR.pdf?src-supplier=Texas+Instruments, ComponentLink6Description=https://datasheet.octopart.com:443/TPS54626PWPR-Texas-Instruments-datasheet-164392911.pdf?src-supplier=LCSC, ComponentLink6URL=https://datasheet.octopart.com:443/TPS54626PWPR-Texas-Instruments-datasheet-164392911.pdf?src-supplier=LCSC, ComponentLink7Description=https://datasheet.octopart.com:443/TPS54626PWPR-Texas-Instruments-datasheet-152588636.pdf?src-supplier=Arrow.cn, ComponentLink7URL=https://datasheet.octopart.com:443/TPS54626PWPR-Texas-Instruments-datasheet-152588636.pdf?src-supplier=Arrow.cn, ComponentLink8Description=https://datasheet.octopart.com:443/TPS54626PWPR-Texas-Instruments-datasheet-137316104.pdf?src-supplier=Future+Electronics, ComponentLink8URL=https://datasheet.octopart.com:443/TPS54626PWPR-Texas-Instruments-datasheet-137316104.pdf?src-supplier=Future+Electronics, ComponentLink9Description=http://sigma.octopart.com:80/reach_statement/Texas-Instruments-company-64.pdf?src-supplier=Compliance+Statements, ComponentLink9URL=http://sigma.octopart.com:80/reach_statement/Texas-Instruments-company-64.pdf?src-supplier=Compliance+Statements, ComponentLink10Description=http://sigma.octopart.com:80/conflict_mineral_statement/Texas-Instruments-company-63.pdf?src-supplier=Compliance+Statements, ComponentLink10URL=http://sigma.octopart.com:80/conflict_mineral_statement/Texas-Instruments-company-63.pdf?src-supplier=Compliance+Statements, Datasheet Link=http://www.ti.com/lit/gpn/tps54626, Geometry.Height=1.2mm, Height=1.2mm, Lead Free="Lead Free", Length=5mm, Lifecycle Status=Production, Manufacturer Part Number=TPS54626PWPR, Manufacturer_Name="Texas Instruments", Manufacturer_Part_Number=TPS54626PWPR, Min Supply Voltage=4.5V, Mounting Technology="Surface Mount", Mouser Price/Stock=https://www.mouser.com/Search/Refine.aspx?Keyword=595-TPS54626PWPR, Number of Outputs=1, Operating Supply Voltage=18V, Output Configuration=Positive, Output Current=6.5A, Output Type=Adjustable, Output Voltage=5.5V, Packaging="Tape & Reel (TR)", Pins=14, Pricing="1=2,62, 10=1,949, 25=1,7824, 100=1,5986, 250=1,511, 500=1,45818, 1000=1,41471 (USD)", Radiation Hardening=No, RoHS=Compliant, Schedule B="8542390000, 8542390000|8542390000|8542390000|8542390000|8542390000", Stock=2008, Supplier=DigiKey, Synchronous Rectifier=Yes, Thickness=1mm, Topology=Buck, Weight=240.999296mg, Width=4.4mm
C1 C2 C3 C4 C5 C6 C7 C8 C9 C10 C11 C12 C13 C14 C15 C16 C17 C18 C19 C20 C21 C22 C23 C24 C25 C26 C27 C28 C29 C30 C31 C32 C33 C34: library part CMP-1037-04778-1, "CAP 1.8uF 10V ±5% 1206 (3216 Metric) Thickness 1.45mm SMD", Case-EIA=1206, Case-Metric=3216, Rated Voltage="10 V", Tolerance=Â±5%, Max Thickness="1.45 mm", Technology=SMT
D1: "TVS Diode (Uni-directional)", Arrow Part Number=SMBJ13A-E3/5B, Manufacturer_Name=Vishay, Mouser Part Number=625-SMBJ13A-E3/5B, Arrow Price/Stock=https://www.arrow.com/en/products/smbj13a-e35b/vishay?utm_currency=USD&region=europe, Datasheet Link=http://www.vishay.com/docs/88392/smbj.pdf, Height=2.44mm, Manufacturer_Part_Number=SMBJ13A-E3/5B, Mouser Price/Stock=https://www.mouser.co.uk/ProductDetail/Vishay-General-Semiconductor/SMBJ13A-E3-5B?qs=3qLEwsAJF5SlimqtZxBirg%3D%3D
D2 D3 D4 D5: library part CMP-2000-07124-1, "Yellow LED, Water Clear Len, 585 nm, 2.1 V, -40 to 85 degC, 2-Pin SMD, RoHS, Tape and Reel", Color=Yellow, Current - Test=20mA, Lens Color=Colorless, Manufacturer=Lumex, Millicandela Rating=6mcd, Package / Case=1206(3216Metric), Package Description="2-Pin Surface Mount Device, Body 3.2 x 1.5 mm", Package Reference=SML-LX1206YC-TR, Standard Package=3,000, Supplier Device Package=1206, Voltage - Forward (Vf) (Typ)=2.1V, Catalog Drawings=SML-LX1206SeriesTopSML-LX1206SeriesSideSML-LX1206SeriesBottomSML-LX1206SeriesFootprint, Category=Optoelectronics, Datasheet URL=http://www.lumex.com/content/files/ProductAttachment/SML-LX1206YC-TR.pdf, Datasheet Version="Rev. K, 08/2012", Family=LEDIndication-Discrete, Features=-, Height (Max)=1.10mm, Lens Style/Size=RectanglewithFlatTop, Lens Transparency=Clear, Manufacturer URL=http://www.lumexinstruments.com/, Mounting Technology=SurfaceMount, Mounting Type=SurfaceMount, Online Catalog=SML-LX1206RectanglewithFlatTop1206PackageLEDs, Other Names=67-1358-2LU60357TRSMLLX1206YCTR, Packaging=Tape&Reel(TR), Product Training Modules=LEDsBenefitsofCustomLEDandLCDTechnology, RoHS Information=RoHSCertofCompliance, Series=-, Size / Dimension=3.20mmLx1.60mmW, Viewing Angle=160°, Wavelength - Dominant=-, Wavelength - Peak=585nm
D6: library part CMP-1060-00515-1, "Zener Voltage Regulator, 500 mW, 2-Pin SOD-123, Pb-Free, Tape and Reel", Manufacturer="On Semiconductor", ComponentLink1Description="Manufacturer URL", ComponentLink1URL=http://www.onsemi.com/, ComponentLink2Description=Datasheet, ComponentLink2URL=http://www.onsemi.com/pub_link/Collateral/MMSZ2V4T1-D.PDF, ComponentLink3Description="Package Specification", ComponentLink3URL=http://www.onsemi.com/pub_link/Collateral/425-04.PDF, DatasheetVersion="Rev. 11", Mounting Technology="Surface Mount", P Max (W)=0.5, PackageDescription="2-Pin SOD, Body 1.6 x 2.69 mm", PackageReference=SOD-123-2-425-04, PackageVersion="Rev. G, 10/2009", Packing="Tape and Reel", PartNumber=MMSZ3V3T1G, RoHS=Pb-Free
F1: library part CMP-08606-000010-2, "PTC RESET FUSE 15V 4A 2920", Case Code (Imperial)=2920, Case Code (Metric)=7351, Hold Current=4A, Max Current Rating=40A, Max Operating Temperature=85°C, Min Operating Temperature=-40°C, Trip Current=8A, Approvals=TUV, Mount="Surface Mount", Packaging="Tape and Reel", Time to Trip=4s
IC1: "Integrated Circuit", Manufacturer_Name=LITTELFUSE, Mouser Part Number=576-SP0502BAJTG, Arrow Part Number=SP0502BAJTG, Arrow Price/Stock=https://www.arrow.com/en/products/sp0502bajtg/littelfuse?region=nac, Datasheet Link=https://www.littelfuse.com/~/media/electronics/datasheets/tvs_diode_arrays/littelfuse_tvs_diode_array_sp05_datasheet.pdf.pdf, Height=1.1mm, Manufacturer_Part_Number=SP0502BAJTG, Mouser Price/Stock=https://www.mouser.co.uk/ProductDetail/Littelfuse/SP0502BAJTG?qs=RnOBYWd%2Fz7cttN1Mwg4HWA%3D%3D
J1: "Plug; XT30; Male; 30A; Low Temperature Rise Fire Retardant", Manufacturer_Name=Amass, ComponentLink1Description=https://datasheet.octopart.com/XT30PW-M-Amass-datasheet-165556440.pdf?src-supplier=TME, ComponentLink1URL=https://datasheet.octopart.com/XT30PW-M-Amass-datasheet-165556440.pdf?src-supplier=TME, Datasheet Link=https://www.tme.eu/sl/Document/ce4077e36b79046da520ca73227e15de/XT30PW%20SPEC.pdf, Geometry.Height=5mm, Manufacturer_Part_Number=XT30PW-M
J3 J6 J7: "Mini-Fit Jr. Through Hole PCB Header, Right Angle, 6 Contacts, 2 Rows, 4.2mm Pitch", Color=Natural, Contact Resistance=10mΩ, Current Rating=8A, Flammability Rating="UL94 V-2", Insulation Resistance=1GΩ, Manufacturer=Molex, Manufacturer Lifecycle Status=ACTIVE, Manufacturer Part Number=39-30-1060, Max Operating Temperature=105°C, Max Voltage Rating (AC)=600V, Min Operating Temperature=-40°C, Package=None, Supplier Part Number=5109859P, Test Voltage=1.5kV, Approvals="CSA, TUV, UL", Availability=Unavailable, Category="Headers and Wire Housings", China RoHS=Compliant, ComponentLink1Description=https://datasheet.octopart.com:443/39-30-1060-Molex-datasheet-120074128.pdf?src-supplier=Farnell, ComponentLink1URL=https://datasheet.octopart.com:443/39-30-1060-Molex-datasheet-120074128.pdf?src-supplier=Farnell, ComponentLink2Description=https://datasheet.octopart.com:443/39-30-1060-Molex-datasheet-101582409.pdf?src-supplier=Farnell, ComponentLink2URL=https://datasheet.octopart.com:443/39-30-1060-Molex-datasheet-101582409.pdf?src-supplier=Farnell, ComponentLink3Description=https://datasheet.octopart.com:443/39-30-1060-Molex-datasheet-14359237.pdf?src-supplier=Farnell, ComponentLink3URL=https://datasheet.octopart.com:443/39-30-1060-Molex-datasheet-14359237.pdf?src-supplier=Farnell, ComponentLink4Description=https://datasheet.octopart.com:443/39-30-1060-Molex-datasheet-8451564.pdf?src-supplier=Farnell, ComponentLink4URL=https://datasheet.octopart.com:443/39-30-1060-Molex-datasheet-8451564.pdf?src-supplier=Farnell, ComponentLink5Description=https://datasheet.octopart.com:443/39-30-1060-Molex-datasheet-8377082.pdf?src-supplier=Farnell, ComponentLink5URL=https://datasheet.octopart.com:443/39-30-1060-Molex-datasheet-8377082.pdf?src-supplier=Farnell, ComponentLink6Description=https://datasheet.octopart.com:443/39-30-1060-Molex-datasheet-8338264.pdf?src-supplier=Farnell, ComponentLink6URL=https://datasheet.octopart.com:443/39-30-1060-Molex-datasheet-8338264.pdf?src-supplier=Farnell, ComponentLink7Description=https://datasheet.octopart.com:443/039301060-Molex-datasheet-8338717.pdf?src-supplier=Upverter, ComponentLink7URL=https://datasheet.octopart.com:443/039301060-Molex-datasheet-8338717.pdf?src-supplier=Upverter, ComponentLink8Description=https://datasheet.octopart.com:443/39-30-1060-Molex-datasheet-13785479.pdf?src-supplier=Sager+Electronics, ComponentLink8URL=https://datasheet.octopart.com:443/39-30-1060-Molex-datasheet-13785479.pdf?src-supplier=Sager+Electronics, ComponentLink9Description=https://sigma.octopart.com:443/15644801/technical_drawing/Molex-39-30-1060.pdf?src-supplier=Molex, ComponentLink9URL=https://sigma.octopart.com:443/15644801/technical_drawing/Molex-39-30-1060.pdf?src-supplier=Molex, ComponentLink10Description=https://datasheet.octopart.com:443/39-30-1060-Molex-datasheet-154749339.pdf?src-supplier=Master+Electronics, ComponentLink10URL=https://datasheet.octopart.com:443/39-30-1060-Molex-datasheet-154749339.pdf?src-supplier=Master+Electronics, ComponentLink11Description=https://datasheet.octopart.com:443/39-30-1060-Molex-datasheet-34205327.pdf?src-supplier=Electro+Sonic, ComponentLink11URL=https://datasheet.octopart.com:443/39-30-1060-Molex-datasheet-34205327.pdf?src-supplier=Electro+Sonic, ComponentLink12Description=https://datasheet.octopart.com:443/39-30-1060-Molex-datasheet-62104200.pdf?src-supplier=Electro+Sonic, ComponentLink12URL=https://datasheet.octopart.com:443/39-30-1060-Molex-datasheet-62104200.pdf?src-supplier=Electro+Sonic, ComponentLink13Description=https://datasheet.octopart.com:443/39-30-1060-Molex-datasheet-23709672.pdf?src-supplier=Electro+Sonic, ComponentLink13URL=https://datasheet.octopart.com:443/39-30-1060-Molex-datasheet-23709672.pdf?src-supplier=Electro+Sonic, ComponentLink14Description=https://datasheet.octopart.com:443/39-30-1060-Molex-datasheet-140183176.pdf?src-supplier=RS+(Formerly+Allied+Electronics), ComponentLink14URL=https://datasheet.octopart.com:443/39-30-1060-Molex-datasheet-140183176.pdf?src-supplier=RS+(Formerly+Allied+Electronics), ComponentLink15Description=https://datasheet.octopart.com:443/39-30-1060-Molex-datasheet-120148730.pdf?src-supplier=RS+(Formerly+Allied+Electronics), ComponentLink15URL=https://datasheet.octopart.com:443/39-30-1060-Molex-datasheet-120148730.pdf?src-supplier=RS+(Formerly+Allied+Electronics), ComponentLink16Description=https://datasheet.octopart.com:443/39-30-1060-Molex-datasheet-34442213.pdf?src-supplier=RS+(Formerly+Allied+Electronics), ComponentLink16URL=https://datasheet.octopart.com:443/39-30-1060-Molex-datasheet-34442213.pdf?src-supplier=RS+(Formerly+Allied+Electronics), ComponentLink17Description=https://datasheet.octopart.com:443/39-30-1060-Molex-datasheet-9719424.pdf?src-supplier=RS+(Formerly+Allied+Electronics), ComponentLink17URL=https://datasheet.octopart.com:443/39-30-1060-Molex-datasheet-9719424.pdf?src-supplier=RS+(Formerly+Allied+Electronics), ComponentLink18Description=https://datasheet.octopart.com:443/39-30-1060-Molex-datasheet-72655.pdf?src-supplier=RS+(Formerly+Allied+Electronics), ComponentLink18URL=https://datasheet.octopart.com:443/39-30-1060-Molex-datasheet-72655.pdf?src-supplier=RS+(Formerly+Allied+Electronics), ComponentLink19Description=https://datasheet.octopart.com:443/39-30-1060-Molex-datasheet-166013077.pdf?src-supplier=Jameco, ComponentLink19URL=https://datasheet.octopart.com:443/39-30-1060-Molex-datasheet-166013077.pdf?src-supplier=Jameco, ComponentLink20Description=https://datasheet.octopart.com:443/39301060-Molex-datasheet-8215776.pdf?src-supplier=Jameco, ComponentLink20URL=https://datasheet.octopart.com:443/39301060-Molex-datasheet-8215776.pdf?src-supplier=Jameco, ComponentLink21Description=https://datasheet.octopart.com:443/39-30-1060-Molex-datasheet-33002875.pdf?src-supplier=Newark, ComponentLink21URL=https://datasheet.octopart.com:443/39-30-1060-Molex-datasheet-33002875.pdf?src-supplier=Newark, ComponentLink22Description=https://datasheet.octopart.com:443/39-30-1060-Molex-datasheet-21207487.pdf?src-supplier=Newark, ComponentLink22URL=https://datasheet.octopart.com:443/39-30-1060-Molex-datasheet-21207487.pdf?src-supplier=Newark, ComponentLink23Description=https://datasheet.octopart.com:443/39-30-1060-Molex-datasheet-2405.pdf?src-supplier=Newark, ComponentLink23URL=https://datasheet.octopart.com:443/39-30-1060-Molex-datasheet-2405.pdf?src-supplier=Newark, ComponentLink24Description=https://datasheet.octopart.com:443/39-30-1060-Molex-datasheet-21395541.pdf?src-supplier=TME, ComponentLink24URL=https://datasheet.octopart.com:443/39-30-1060-Molex-datasheet-21395541.pdf?src-supplier=TME, ComponentLink25Description=https://datasheet.octopart.com:443/0039301060-Molex-datasheet-11554567.pdf?src-supplier=Arrow+Electronics, ComponentLink25URL=https://datasheet.octopart.com:443/0039301060-Molex-datasheet-11554567.pdf?src-supplier=Arrow+Electronics, ComponentLink26Description=https://datasheet.octopart.com:443/39-30-1060-Molex-datasheet-8361750.pdf?src-supplier=Verical, ComponentLink26URL=https://datasheet.octopart.com:443/39-30-1060-Molex-datasheet-8361750.pdf?src-supplier=Verical, ComponentLink27Description=https://datasheet.octopart.com:443/39-30-1060-Molex-datasheet-129274.pdf?src-supplier=DigiKey, ComponentLink27URL=https://datasheet.octopart.com:443/39-30-1060-Molex-datasheet-129274.pdf?src-supplier=DigiKey, ComponentLink28Description=http://sigma.octopart.com:80/15645378/rohs_certificate/Molex-39-30-1060.pdf?src-supplier=Compliance+Statements, ComponentLink28URL=http://sigma.octopart.com:80/15645378/rohs_certificate/Molex-39-30-1060.pdf?src-supplier=Compliance+Statements, ComponentLink29Description=http://sigma.octopart.com:80/conflict_mineral_statement/Molex-company-72.pdf?src-supplier=Compliance+Statements, ComponentLink29URL=http://sigma.octopart.com:80/conflict_mineral_statement/Molex-company-72.pdf?src-supplier=Compliance+Statements, ComponentLink30Description=http://sigma.octopart.com:80/rohs_statement/Molex-company-73.pdf?src-supplier=Compliance+Statements, ComponentLink30URL=http://sigma.octopart.com:80/rohs_statement/Molex-company-73.pdf?src-supplier=Compliance+Statements, ComponentLink31Description=http://sigma.octopart.com:80/reach_statement/Molex-company-74.pdf?src-supplier=Compliance+Statements, ComponentLink31URL=http://sigma.octopart.com:80/reach_statement/Molex-company-74.pdf?src-supplier=Compliance+Statements, Connector Type="Power, Rectangular", Contact Gender=Male, Contact Material=Brass, Contact Plating=Tin, Country of Origin=US, Depth=12.8mm, ELV=Compliant, Gender=Male, Glow Wire Compliant=Non-compliant, Halogen Free="Low Halogen", Height=11.65mm, Housing Color=Natural, Housing Material=Nylon, Lead Free="Lead Free", Lead Pitch=4.2mm, Length=13.8mm, Lifecycle Status=Production, Material=Nylon, Max Current Rating=8A, Mounting Technology="PCB, Through Hole", MP=39301060, Number of Circuits=4, Number of Contacts=6, Number of Lines=2, Number of Poles=6, Number of Positions=6, Number of Rows=1, Orientation="Right Angle, Vertical", Packaging=Bulk, Pins=6, Pitch=4.2mm, Plating Thickness=2.54µm, Price=None, Radiation Hardening=No, REACH SVHC=Yes, RoHS=Compliant, Row Spacing=5.5mm, Schedule B="8536694040, 8536694040|8536694040|8536694040|8536694040|8536694040|8536694040|8536694040|8536694040|8536694040|8536694040|8536694040|8536694040|8536694040|8536694040|8536694040|8536694040|8536694040|8536694040|8536694040|8536694040|8536694040|8536694040|8536694040|85", Supplier=RS, Termination=Solder, Voltage Rating=600V, Voltage Rating (AC)=600V, Voltage Rating (DC)=600V, Working Voltage=600V
  J3: Stock=3490
  J6 J7: Stock=3510
J4: "Conn Shrouded Header (4 Sides) M 6 POS 2.54mm Solder ST Top Entry Thru-Hole Tray", Color=Black, Contact Resistance=20mΩ, Current Rating=3A, Insulation Resistance=1GΩ, Manufacturer="Wurth Elektronik", Max Operating Temperature=105°C, Min Operating Temperature=-40°C, Mouser Part Number=710-61200621621, Operating Supply Voltage=250V, Supplier Part Number=8236430, Category="Headers and Wire Housings", ComponentLink1Description=https://datasheet.octopart.com:443/61200621621-Wurth-Elektronik-datasheet-168479915.pdf?src-supplier=Newark, ComponentLink1URL=https://datasheet.octopart.com:443/61200621621-Wurth-Elektronik-datasheet-168479915.pdf?src-supplier=Newark, ComponentLink2Description=https://datasheet.octopart.com:443/61200621621-W%C3%BCrth-Elektronik-datasheet-5367532.pdf?src-supplier=Newark, ComponentLink2URL=https://datasheet.octopart.com:443/61200621621-W%C3%BCrth-Elektronik-datasheet-5367532.pdf?src-supplier=Newark, ComponentLink3Description=https://datasheet.octopart.com:443/61200621621-W%C3%BCrth-Elektronik-datasheet-62127819.pdf?src-supplier=Upverter, ComponentLink3URL=https://datasheet.octopart.com:443/61200621621-W%C3%BCrth-Elektronik-datasheet-62127819.pdf?src-supplier=Upverter, ComponentLink4Description=https://datasheet.octopart.com:443/61200621621-W%C3%BCrth-Elektronik-datasheet-111087935.pdf?src-supplier=Wurth+Elektronik, ComponentLink4URL=https://datasheet.octopart.com:443/61200621621-W%C3%BCrth-Elektronik-datasheet-111087935.pdf?src-supplier=Wurth+Elektronik, ComponentLink5Description=https://datasheet.octopart.com:443/61200621621-W%C3%BCrth-Elektronik-datasheet-149523874.pdf?src-supplier=Farnell, ComponentLink5URL=https://datasheet.octopart.com:443/61200621621-W%C3%BCrth-Elektronik-datasheet-149523874.pdf?src-supplier=Farnell, Connector Type="Male Pin", Contact Material=Copper, Contact Plating=Gold, Datasheet Link=https://katalog.we-online.de/em/datasheet/6120xx21621.pdf, Gender=Male, Geometry.Height=9.1mm, Insulation Material=PBT, Lead Pitch=2.54mm, Length=15.28mm, Manufacturer Part Number=61200621621, Manufacturer_Name="Wurth Elektronik", Manufacturer_Part_Number=61200621621, Mounting Technology="Through Hole", Mouser Price/Stock=https://www.mouser.co.uk/ProductDetail/Wurth-Elektronik/61200621621?qs=PhR8RmCirEbjX8n1RKw4Jw%3D%3D, Number of Contacts=6, Number of Positions=6, Number of Rows=2, Orientation=Vertical, Pins=6, Pitch=2.54mm, RoHS=Compliant, Row Spacing=2.54mm, Stock=450, Supplier=RS, Termination=Solder
J5: library part CMP-2000-07330-1, "Post Terminal Strip Assembly, Pitch 2.54 mm, 2 x 5 Position, Height 8.58 mm, Tail Length 2.54 mm, -55 to 125 degC, RoHS, Bulk", Color=Black, Manufacturer=Samtec-Inc., Package Description="Male Header, Pitch 2.54 mm, 2 x 5 Position, Height 8.58 mm, Tail Length 2.54 mm", Category=Connectors,Interconnects, Connector Type=Header,Unshrouded, Contact Finish=Gold, Contact Finish Thickness=10µin(0.25µm), Contact Mating Length="0.230\"(5.84mm)", Contact Type=MalePin, Datasheet URL=http://suddendocs.samtec.com/prints/tsw-xxx-xx-xxx-x-xx-xxx-mkt.pdf, Datasheet Version="Rev. DO, 08/1988", Family=RectangularConnectors-Headers,MalePins, Fastening Type=-, Features=-, Manufacturer URL=http://www.samtec.com/, Mounting Technology=ThroughHole, Mounting Type=ThroughHole, Number of Positions=10, Number of Positions Loaded=All, Number of Rows=2, Package Reference=TSW-105-07-G-D, Package URL=http://suddendocs.samtec.com/prints/tsw-xxx-xx-x-x-xx-xxx-footprint.pdf, Packaging=Bulk, Pitch="0.100\"(2.54mm)", Row Spacing="0.100\"(2.54mm)", Series=TSW, Termination=Solder